# EAGLE board usb-led (EAGLE 7.4.0)
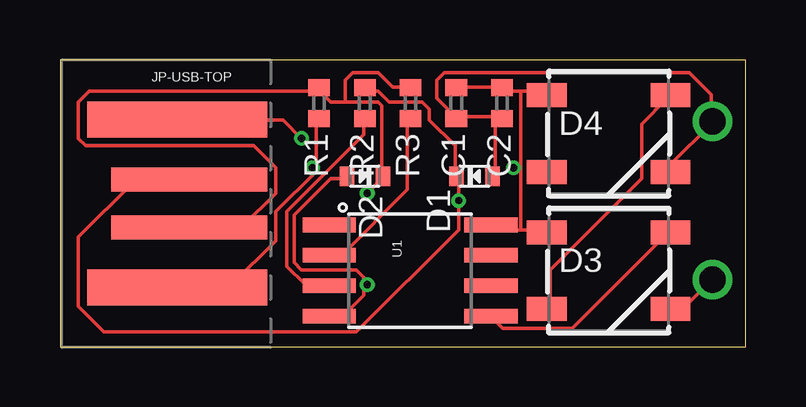
[diagram p0: board, top side]
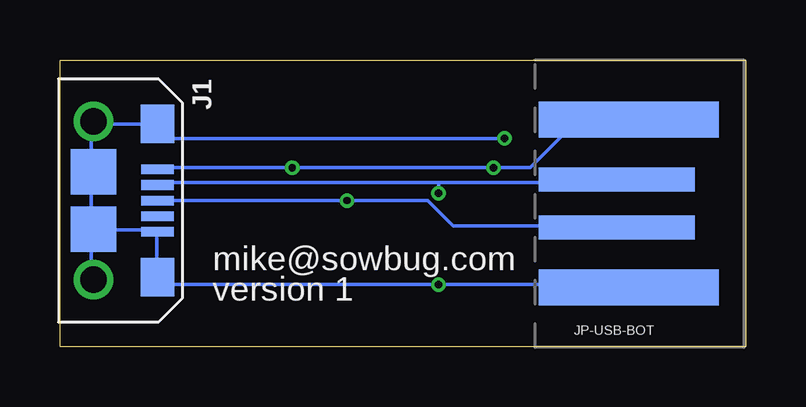
[diagram p1: board, bottom side, seen from below]

Size 28.57 x 11.96 mm. Coordinates in mm from the lower left corner, seen from the top.
Outline: 0,0 28.57,0 28.57,11.96 0,11.96 0,0
Copper layers (1*16): Top 0.035mm / dielectric 0.2mm / Bottom 0.035mm
Design rules "MacroFab_MF_2_Layer": minimum track width 6mil, minimum drill 12mil, track to track 6mil, track to pad 6mil, pad to pad 6mil, via to via 6mil, smd to smd 0mil, copper to edge 10mil, drill to drill 10mil, minimum pad ring 6mil, minimum via ring 6mil, stop-mask expansion 2mil, vias tented up to drill 25mil, thermal gap 10mil
vRestrict: area 0,0 to 9.5,12.1

## Footprints (pad centres in the part's own frame; a part is rotated, then mirrored left to right if it is on the bottom)
C0402 = smd 0.7 x 0.9: 1 -0.65,0; 2 0.65,0
SOD-523 = smd 0.8 x 0.6: A 0,-0.75; K 0,0.75
WS2812B = smd 1.651 x 1: 1 -2.577,1.6; 2 -2.577,-1.6; 3 2.577,-1.6; 4 2.577,1.6
MICROUSB-RIGHT = smd 0.4 x 1.35: 1 -1.3,1.27; 2 -0.65,1.27; 3 0,1.27; 4 0.65,1.27; 5 1.3,1.27 | drill 1.1: S1 -3.3,-1.405; S2 3.3,-1.405 | smd 1.6 x 1.4: S3 -3.2,1.27; S4 3.2,1.27 | smd 1.9 x 1.9: S5 -1.2,-1.405; S6 1.2,-1.405
USB-A-PCB = smd 7.5 x 1.5: 5V -0.2,-3.5; GND -0.2,3.5 | smd 6.5 x 1: USB_M 0.3,-1; USB_P 0.3,1
R0402 = smd 0.7 x 0.9: 1 -0.65,0; 2 0.65,0
SO08-EIAJ = smd 0.61 x 2.21: 1 -1.905,-3.378; 2 -0.635,-3.378; 3 0.635,-3.378; 4 1.905,-3.378; 5 1.905,3.353; 6 0.635,3.353; 7 -0.635,3.353; 8 -1.905,3.353

## Placement (x,y rotation side)
C1  10uF  [C0402]  16.51,10.16 270 top
C2  0.1uF  [C0402]  18.41,10.16 270 top
D1  3.6V  [SOD-523]  17.27,7.11 90 top
D2  3.6V  [SOD-523]  12.7,7.11 270 top
D3  WS2812B  [WS2812B]  22.86,3.17 0 top
D4  WS2812B  [WS2812B]  22.86,8.89 0 top
J1  [MICROUSB-RIGHT]  25.78,6.1 270 bottom
JP-USB-BOT  USBPCB  [USB-A-PCB]  5.08,5.97 180 bottom
JP-USB-TOP  USBPCB  [USB-A-PCB]  5.08,5.97 0 top
R1  1.5K  [R0402]  10.79,10.16 270 top
R2  68  [R0402]  12.7,10.16 270 top
R3  68  [R0402]  14.61,10.16 270 top
U1  ATtiny85-20SU  [SO08-EIAJ]  14.61,3.17 270 top

## Library data of the parts
C1 C2 R1-R3 = rcl
D1 D2 = microbuilder
D3 D4 = SparkFun-LED; PROD_ID: DIO-12503
J1 = MF_Connectors
JP-USB-BOT JP-USB-TOP = SparkFun-Connectors
U1 = SparkFun-DigitalIC; PROD_ID: IC-09092

## Nets
DIN_2: D3.2 D4.4
GND: C1.2 C2.2 D1.A D2.A D3.3 D4.3 J1.5 J1.S1 J1.S2 J1.S3 J1.S4 J1.S5 J1.S6 JP-USB-BOT.GND JP-USB-TOP.GND U1.4
MISO: U1.6
MOSI/DIN: D3.4 U1.5
RESET: U1.1
SCK: U1.7
USB_D_MINUS: R3.2 U1.2
USB_D_MINUS_RAW: D2.K J1.2 JP-USB-BOT.USB_M JP-USB-TOP.USB_M R1.1 R3.1
USB_D_PLUS: R2.2 U1.3
USB_D_PLUS_RAW: D1.K J1.3 JP-USB-BOT.USB_P JP-USB-TOP.USB_P R2.1
VCC: C1.1 C2.1 D3.1 D4.1 J1.1 JP-USB-BOT.5V JP-USB-TOP.5V R1.2 U1.8

## Tracks (layer width: path | path; a pad name or v marks a point on that pad's centre or on a via)
DIN_2
  Top 0.152: D3.2 20.42,1.68 20.42,3.2 24.23,7.01 24.23,9.3 25.3,10.36 D4.4
GND  (via drill 0.3)
  Top 0.152: 12.65,2.59 12.65,2.13 11.89,1.37 11.28,1.37 U1.4 | 12.65,2.59 12.65,2.9 12.34,3.2 10.06,3.2 9.75,3.5 9.75,5.49 11.28,7.01 11.89,7.01 D2.A | v12.8,2.59 12.65,2.59 | D3.3 25.45,1.68 26.06,1.68 27.13,2.74 J1.S2 | D1.A 18.14,7.16 18.14,9.3 18.29,9.45 C2.2 18.29,9.6 16.61,9.6 C1.2 16.46,9.6 15.7,10.36 15.7,11.12 16,11.43 26.21,11.43 27.13,10.52 27.13,9.45 J1.S1 27.13,9.3 25.45,7.62 25.45,7.32 D4.3 | v10.06,8.69 9.3,9.45 5.03,9.45 JP-USB-TOP.GND
  Bottom 0.152: JP-USB-BOT.GND 5.03,2.59 v12.8,2.59 24.08,2.59 24.38,2.9 J1.S4 24.54,3.05 24.54,4.72 J1.5 24.54,4.88 27.13,4.88 J1.S6 | J1.S6 27.28,4.88 27.28,2.9 J1.S2 | J1.S6 27.28,5.03 27.28,7.16 J1.S5 27.28,7.32 27.28,9.3 J1.S1 27.13,9.3 24.54,9.3 J1.S3 24.38,9.14 23.93,8.69 v10.06,8.69
MOSI/DIN
  Top 0.152: D3.4 25.3,4.72 21.34,0.76 18.44,0.76 17.98,1.22 U1.5
USB_D_MINUS
  Top 0.152: U1.2 11.73,3.81 14.48,6.55 14.48,9.45 R3.2
USB_D_MINUS_RAW  (via drill 0.3)
  Top 0.152: 11.89,10.21 11.28,10.21 10.82,10.67 R1.1 10.67,10.67 1.22,10.67 0.76,10.21 0.76,8.69 1.07,8.38 8.08,8.38 8.99,7.47 8.99,6.4 7.62,5.03 5.49,5.03 JP-USB-TOP.USB_M | 11.89,10.21 13.26,10.21 13.41,10.06 13.41,7.16 D2.K 13.41,7.01 v12.8,6.4 | 11.89,10.21 11.89,11.12 12.19,11.43 13.26,11.43 13.87,10.82 14.48,10.82 R3.1
  Bottom 0.152: 12.8,6.86 5.49,6.86 JP-USB-BOT.USB_M | 12.8,6.86 24.38,6.86 J1.2 | 12.8,6.86 v12.8,6.4
USB_D_PLUS
  Top 0.152: R2.2 12.65,9.45 12.65,8.84 9.45,5.64 9.45,3.35 10.21,2.59 11.12,2.59 U1.3
USB_D_PLUS_RAW  (via drill 0.3)
  Top 0.152: R2.1 12.8,10.67 13.26,10.67 13.72,10.21 15.09,10.21 15.39,9.91 15.39,9.45 16.46,8.38 16.46,7.16 D1.K 16.61,7.01 v16.61,6.1 16.61,4.88 12.34,0.61 1.83,0.61 0.76,1.68 0.76,4.57 3.05,6.86 5.33,6.86 JP-USB-TOP.USB_P
  Bottom 0.152: J1.3 v16.61,6.1 13.26,6.1 12.19,5.03 5.49,5.03 JP-USB-BOT.USB_P
VCC  (via drill 0.3)
  Top 0.152: 10.67,7.47 10.67,7.32 8.99,5.64 8.99,4.42 7.16,2.59 5.03,2.59 JP-USB-TOP.5V | 10.67,7.47 10.67,9.45 R1.2 | C1.1 16.61,10.82 18.29,10.82 C2.1 18.44,10.67 19.2,10.67 | 19.2,10.67 20.12,10.67 20.27,10.52 D4.1 | 19.2,4.88 18.14,4.88 17.98,5.03 U1.8 | 19.2,4.88 20.27,4.88 D3.1 | 19.2,4.88 19.2,7.47 | 19.2,7.47 19.2,10.67 | v18.9,7.47 19.2,7.47 | v10.52,7.47 10.67,7.47
  Bottom 0.152: J1.1 24.38,7.47 v18.9,7.47 v10.52,7.47 8.99,7.47 7.01,9.45 5.03,9.45 JP-USB-BOT.5V

## Text on the board
bPlace: mike@sowbug.com | version 1